# EAGLE board Optronik(2022) (EAGLE 7.5.0)
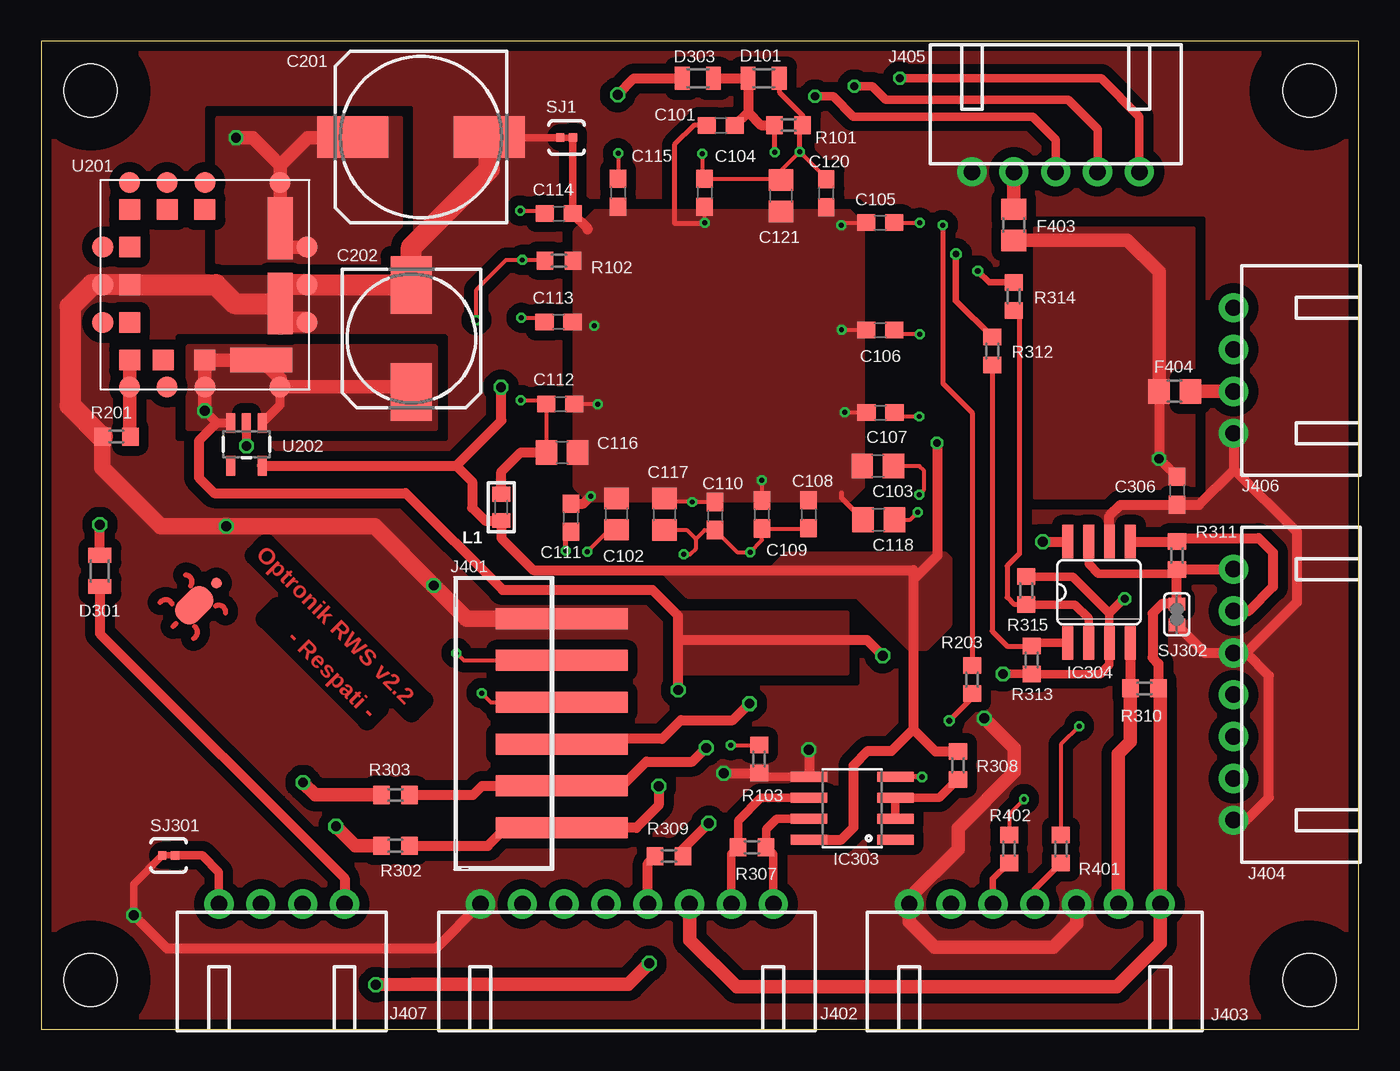
[diagram p0: board, top side]
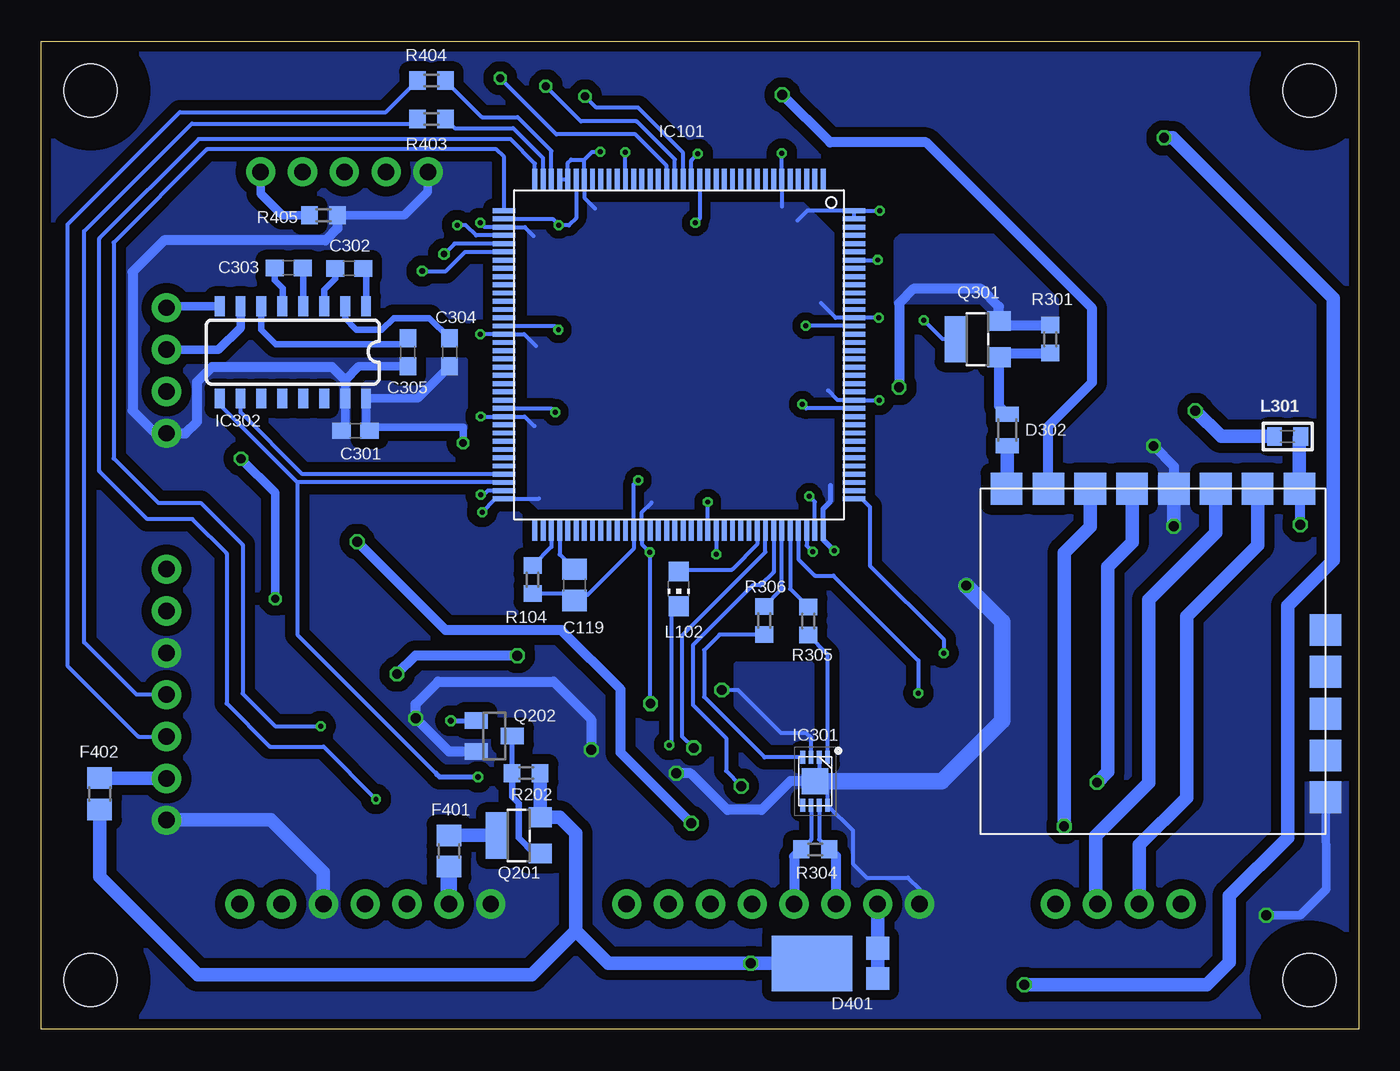
[diagram p1: board, bottom side, seen from below]

Size 80 x 60 mm. Coordinates in mm from the lower left corner, seen from the top.
Outline: 0,0 80,0 80,60 0,60 0,0
Copper layers (1*16): Top 0.035mm / dielectric 1.5mm / Bottom 0.035mm
Design rules "pcbgogo *": minimum track width 6mil, minimum drill 0.3mm, track to track 6mil, track to pad 6mil, pad to pad 6mil, via to via 6mil, smd to smd 0mil, copper to edge 0.4mm, drill to drill 0.25mm, minimum pad ring 6mil, minimum via ring 6mil, stop-mask expansion 4mil, vias tented up to drill 0.65mm, thermal gap 10mil
Net classes: 0 default: width 0.203 mm, drill 0.29 mm, clearance 0.203 mm; 1 ic: width 0.203 mm, drill 0.29 mm, clearance 0.203 mm; 2 power: width 0.406 mm, drill 0.59 mm, clearance 0.406 mm
Holes 3.2 mm at 3,3 77,3 77,57 3,57
tRestrict: area 0,54 to 6,60; area 74,54 to 80,60; area 74,0 to 80,6; area 0,0 to 6,6
bRestrict: area 0,0 to 6,6; area 74,0 to 80,6; area 74,54 to 80,60; area 0,54 to 6,60

## Footprints (pad centres in the part's own frame; a part is rotated, then mirrored left to right if it is on the bottom)
C0603 = smd 1.1 x 1: 1 -0.85,0; 2 0.85,0
C0805 = smd 1.3 x 1.5: 1 -0.95,0; 2 0.95,0
153CLV-1012 = smd 4.3 x 2.5: + 4.15,0; - -4.15,0
153CLV-0810 = smd 3.5 x 2.5: + 3.25,0; - -3.25,0
MICROMELF-W = smd 0.9 x 1.4: A 0.95,0; C -0.95,0
POWERDI5-3 = smd 1.39 x 1.4: 1 0.92,-2.856; 2 -0.92,-2.856 | smd 3.36 x 4.86: 3 0,1.126
L0805 = smd 1.3 x 1.5: 1 -0.95,0; 2 0.95,0
LQFP144-2 = smd 0.297 x 1.35: 1 -8.75,-10.625; 2 -8.25,-10.625; 3 -7.75,-10.625; 4 -7.25,-10.625; 5 -6.75,-10.625; 6 -6.25,-10.625; 7 -5.75,-10.625; 8 -5.25,-10.625; 9 -4.75,-10.625; 10 -4.25,-10.625; 11 -3.75,-10.625; 12 -3.25,-10.625; 13 -2.75,-10.62; 14 -2.25,-10.625; 15 -1.75,-10.625; 16 -1.25,-10.625; 17 -0.75,-10.625; 18 -0.25,-10.625; 19 0.25,-10.625; 20 0.75,-10.625; 21 1.25,-10.625; 22 1.75,-10.625; 23 2.25,-10.625; 24 2.75,-10.62; 25 3.25,-10.625; 26 3.75,-10.625; 27 4.25,-10.625; 28 4.75,-10.625; 29 5.25,-10.625; 30 5.75,-10.625; 31 6.25,-10.625; 32 6.75,-10.625; 33 7.25,-10.625; 34 7.75,-10.625; 35 8.25,-10.625; 36 8.75,-10.625; 73 8.75,10.625; 74 8.25,10.625; 75 7.75,10.625; 76 7.25,10.625; 77 6.75,10.625; 78 6.25,10.625; 79 5.75,10.625; 80 5.25,10.625; 81 4.75,10.625; 82 4.25,10.625; 83 3.75,10.625; 84 3.25,10.625; 85 2.75,10.625; 86 2.25,10.625; 87 1.75,10.625; 88 1.25,10.625; 89 0.75,10.625; 90 0.25,10.625; 91 -0.25,10.625; 92 -0.75,10.625; 93 -1.25,10.625; 94 -1.75,10.625; 95 -2.25,10.625; 96 -2.75,10.625; 97 -3.25,10.625; 98 -3.75,10.625; 99 -4.25,10.625; 100 -4.75,10.625; 101 -5.25,10.625; 102 -5.75,10.625; 103 -6.25,10.625; 104 -6.75,10.625; 105 -7.25,10.625; 106 -7.75,10.625; 107 -8.25,10.625; 108 -8.75,10.625 | smd 1.35 x 0.297: 37 10.625,-8.75; 38 10.625,-8.25; 39 10.625,-7.75; 40 10.625,-7.25; 41 10.625,-6.75; 42 10.625,-6.25; 43 10.625,-5.75; 44 10.625,-5.25; 45 10.625,-4.75; 46 10.625,-4.25; 47 10.625,-3.75; 48 10.625,-3.25; 49 10.625,-2.75; 50 10.625,-2.25; 51 10.625,-1.75; 52 10.625,-1.25; 53 10.625,-0.75; 54 10.625,-0.25; 55 10.625,0.25; 56 10.625,0.75; 57 10.625,1.25; 58 10.625,1.75; 59 10.625,2.25; 60 10.625,2.75; 61 10.625,3.25; 62 10.625,3.75; 63 10.625,4.25; 64 10.625,4.75; 65 10.625,5.25; 66 10.625,5.75; 67 10.625,6.25; 68 10.625,6.75; 69 10.625,7.25; 70 10.625,7.75; 71 10.625,8.25; 72 10.625,8.75; 109 -10.625,8.75; 110 -10.625,8.25; 111 -10.625,7.75; 112 -10.625,7.25; 113 -10.625,6.75; 114 -10.625,6.25; 115 -10.625,5.75; 116 -10.625,5.25; 117 -10.625,4.75; 118 -10.625,4.25; 119 -10.625,3.75; 120 -10.625,3.25; 121 -10.625,2.75; 122 -10.625,2.25; 123 -10.625,1.75; 124 -10.625,1.25; 125 -10.625,0.75; 126 -10.625,0.25; 127 -10.625,-0.25; 128 -10.625,-0.75; 129 -10.625,-1.25; 130 -10.625,-1.75; 131 -10.625,-2.25; 132 -10.625,-2.75; 133 -10.625,-3.25; 134 -10.625,-3.75; 135 -10.625,-4.25; 136 -10.625,-4.75; 137 -10.625,-5.25; 138 -10.625,-5.75; 139 -10.625,-6.25; 140 -10.625,-6.75; 141 -10.625,-7.25; 142 -10.625,-7.75; 143 -10.625,-8.25; 144 -10.625,-8.75
TDFN-8 = smd 0.8 x 0.29: 1 -1.45,0.75; 2 -1.45,0.25; 3 -1.45,-0.25; 4 -1.45,-0.75; 5 1.45,-0.75; 6 1.45,-0.25; 7 1.45,0.25; 8 1.45,0.75 | smd 1.6 x 1.6: 9 0,0
SO016 = smd 0.6 x 1.2: 1 -4.445,-2.8; 2 -3.175,-2.8; 3 -1.905,-2.8; 4 -0.635,-2.8; 5 0.635,-2.8; 6 1.905,-2.8; 7 3.175,-2.8; 8 4.445,-2.8; 9 4.445,2.8; 10 3.175,2.8; 11 1.905,2.8; 12 0.635,2.8; 13 -0.635,2.8; 14 -1.905,2.8; 15 -3.175,2.8; 16 -4.445,2.8
SO08 = smd 0.61 x 2.21: 1 -1.905,-2.616; 2 -0.635,-2.616; 3 0.635,-2.616; 4 1.905,-2.616; 5 1.905,2.616; 6 0.635,2.616; 7 -0.635,2.616; 8 -1.905,2.616
SO08' = smd 0.66 x 2.032: 1 -1.905,-3.073; 2 -0.635,-3.073; 3 0.635,-3.073; 4 1.905,-3.073; 5 1.905,3.073; 6 0.635,3.073; 7 -0.635,3.073; 8 -1.905,3.073
XHS-6-VERT-SMD = smd 1.27 x 8: 1 6.35,0.5; 2 3.81,0.5; 3 1.27,0.5; 4 -1.27,0.5; 5 -3.81,0.5; 6 -6.35,0.5
XHS-8-RA = drill 1 pad 1.778: 1 8.89,0; 2 6.35,0; 3 3.81,0; 4 1.27,0; 5 -1.27,0; 6 -3.81,0; 7 -6.35,0; 8 -8.89,0
XHS-7-RA = drill 1 pad 1.778: 1 7.62,0; 2 5.08,0; 3 2.54,0; 4 0,0; 5 -2.54,0; 6 -5.08,0; 7 -7.62,0
XHS-5-RA = drill 1 pad 1.778: 1 5.08,0; 2 2.54,0; 3 0,0; 4 -2.54,0; 5 -5.08,0
XHS-4-RA = drill 1 pad 1.778: 1 3.81,0; 2 1.27,0; 3 -1.27,0; 4 -3.81,0
L0603 = smd 0.9 x 1.1: 1 -0.794,0; 2 0.794,0
CHIP-LED0805 = smd 1.2 x 1.2: A 0,-1.05; C 0,1.05
SOT23-W = smd 1.2 x 1.4: 1 -1.1,-1.3; 2 1.1,-1.3 | smd 2.8 x 1.4: 3 0,1.3
SOT23 = smd 1 x 1.4: 1 -0.95,-1.1; 2 0.95,-1.1; 3 0,1.1
R0603 = smd 1 x 1.1: 1 -0.85,0; 2 0.85,0
SJ_2S-TRACE_THICK = smd 0.5 x 0.5: 1 -0.381,0; 2 0.381,0
SJS = smd 0.762 x 1.016: 1 -0.635,0; 2 0.635,0
OKL2T/3W5NC = smd 1.27 x 1.27: 1 -6.2,0; 1@1 -4.57,0; 2 -2.29,6.2; 2@1 -6.2,4.57; 3 0,6.2; 3@1 2.29,6.2; 4 6.2,4.57; 5 6.2,0; 5@1 4.57,0; 6 6.2,-4.57; 6@1 4.57,-4.57; 7 0,-6.2; 7@1 0,-4.57; 8 -2.29,-6.2; 8@1 -2.29,-4.57; 9 -6.2,-4.57; 9@1 -4.57,-4.57; 10 -6.2,-2.29; 10@1 -4.57,-2.29; 11 6.2,-2.29; 11@1 4.57,-2.54; 12 2.29,-6.2; 12@1 2.29,-4.57 | smd 3.75 x 1.5: 2@2 -3.43,4.57; 3@2 1.14,4.57 | smd 1.5 x 3.75: 4@1 4.57,3.43
SOT23-5 = smd 0.55 x 1.2: 1 -0.95,-1.3; 2 0,-1.3; 3 0.95,-1.3; 4 0.95,1.3; 5 -0.95,1.3
MOD_CP2105_BOARD = smd 1.93 x 1.93: 1 -10.477,8.89; 2 -10.477,6.35; 3 -10.477,3.81; 4 -10.477,1.27; 5 -10.477,-1.27; 6 -10.477,-3.81; 7 -10.477,-6.35; 8 -10.477,-8.89; 9 8.255,10.477; 10 5.715,10.477; 11 3.175,10.477; 12 0.635,10.477; 13 -1.905,10.477
KURRO-LOGO = smd 2.54 x 1.651 rotated 45 bottom: P$1 0,0 | smd 0.635 x 0.635 rotated 45 bottom: P$2 1.347,1.347

## Placement (x,y rotation side)
C101  100n  [C0603]  41.27,54.89 180 top
C102  2u2  [C0805]  34.92,31.29 90 top
C103  2u2  [C0805]  50.8,34.21 180 top
C104  100n  [C0603]  40.28,50.8 270 top
C105  100n  [C0603]  50.95,48.98 180 top
C106  100n  [C0603]  50.95,42.47 180 top
C107  100n  [C0603]  50.96,37.46 180 top
C108  100n  [C0603]  46.6,31.27 90 top
C109  100n  [C0603]  43.76,31.26 90 top
C110  100n  [C0603]  40.92,31.17 90 top
C111  100n  [C0603]  32.17,31.07 90 top
C112  100n  [C0603]  31.53,37.96 0 top
C113  100n  [C0603]  31.41,42.95 0 top
C114  100n  [C0603]  31.43,49.53 0 top
C115  100n  [C0603]  35.02,50.8 270 top
C116  4u7  [C0805]  31.62,35.03 0 top
C117  1u  [C0805]  37.85,31.27 90 top
C118  1u  [C0805]  50.85,30.95 180 top
C119  2u2  [C0805]  47.62,26.99 270 bottom
C120  100n  [C0603]  47.67,50.77 270 top
C121  1u  [C0805]  44.91,50.61 270 top
C201  470u/35V  [153CLV-1012]  23.06,54.18 180 top
C202  1000u/6V3  [153CLV-0810]  22.47,41.95 270 top
C301  100n  [C0603]  60.91,36.35 180 bottom
C302  100n  [C0603]  61.3,46.21 0 bottom
C303  100n  [C0603]  64.98,46.23 0 bottom
C304  100n  [C0603]  55.2,41.11 270 bottom
C305  100n  [C0603]  57.74,41.11 90 bottom
C306  100n  [C0603]  68.97,32.7 270 top
D101  SCHOTTKY  [MICROMELF-W]  43.87,57.75 180 top
D301  SCHOTTKY  [MICROMELF-W]  3.56,27.84 270 top
D302  SCHOTTKY  [MICROMELF-W]  21.34,36.39 90 bottom
D303  SCHOTTKY  [MICROMELF-W]  39.87,57.74 0 top
D401  SDT5100LP5  [POWERDI5-3]  32.08,4.01 90 bottom
F401  2A  [L0805]  55.24,10.84 90 bottom
F402  2A  [L0805]  76.45,14.31 90 bottom
F403  2A  [L0805]  59.05,48.85 270 top
F404  1A  [L0805]  68.82,38.73 180 top
IC101  STM32F723ZET  [LQFP144-2]  41.27,40.96 180 bottom
IC301  MCP2544FDT-E  [TDFN-8]  33.01,15.07 270 bottom
IC302  SP3232EUCN-L  [SO016]  64.72,41.11 180 bottom
IC303  SP3485  [SO08]  49.24,13.42 90 top
IC304  MAX4313ESA  [SO08']  64.23,26.54 0 top
J401  PROG_DEBUG  [XHS-6-VERT-SMD]  31.1,18.59 270 top
J402  BUS_PANEL  [XHS-8-RA]  35.56,7.62 180 top
J403  THERMAL  [XHS-7-RA]  60.33,7.62 180 top
J404  SONY  [XHS-7-RA]  72.39,20.32 270 top
J405  LRF_NOPTEL  [XHS-5-RA]  61.59,52.07 0 top
J406  IMU  [XHS-4-RA]  72.39,40.01 270 top
J407  PROG_EXTERNAL  [XHS-4-RA]  14.61,7.62 180 top
L1  FB_0603  [L0603]  27.94,31.7 90 top
L102  GREEN  [CHIP-LED0805]  41.3,26.75 180 bottom
L301  FB_0603  [L0603]  4.33,36 180 bottom
Q201  BSS215PH6327XT  [SOT23-W]  51.01,11.78 90 bottom
Q202  2N2222  [SOT23]  52.49,17.81 270 bottom
Q301  BSS215PH6327XT  [SOT23-W]  23.15,41.91 90 bottom
R101  100K  [R0603]  45.39,54.9 180 top
R102  100K  [R0603]  31.43,46.67 0 top
R103  330R  [R0603]  43.59,16.42 90 top
R104  3k  [R0603]  50.16,27.3 90 bottom
R201  1k37  [R0603]  4.56,35.99 0 top
R202  10k  [R0603]  50.55,15.56 180 bottom
R203  120R  [R0603]  56.52,21.24 90 top
R301  100k  [R0603]  18.73,41.91 90 bottom
R302  120R  [R0603]  21.5,11.15 180 top
R303  120R  [R0603]  21.51,14.23 180 top
R304  120R  [R0603]  33,10.93 0 bottom
R305  120R  [R0603]  33.43,24.8 90 bottom
R306  120R  [R0603]  36.1,24.82 90 bottom
R307  120R  [R0603]  43.16,11.06 180 top
R308  10k  [R0603]  55.66,16.04 90 top
R309  75R  [R0603]  38.12,10.52 180 top
R310  75R  [R0603]  66.99,20.71 180 top
R311  75R  [R0603]  68.96,28.77 90 top
R312  120R  [R0603]  57.74,41.19 90 top
R313  10k  [R0603]  60.14,22.43 90 top
R314  120R  [R0603]  59.05,44.51 90 top
R315  10k  [R0603]  59.8,26.64 90 top
R401  1k  [R0603]  61.91,10.95 270 top
R402  1k  [R0603]  58.77,10.96 270 top
R403  1k  [R0603]  56.3,55.28 0 bottom
R404  1k  [R0603]  56.31,57.61 0 bottom
R405  10k  [R0603]  62.86,49.43 180 bottom
SJ1  CLOSED  [SJ_2S-TRACE_THICK]  31.9,54.15 0 top
SJ301  NC  [SJ_2S-TRACE_THICK]  7.74,10.56 180 top
SJ302  NO  [SJS]  68.95,25.2 90 top
U201  OKL-T/3-W12P-C  [OKL2T/3W5NC]  9.94,45.21 270 top
U202  V_REG_LDOSMD  [SOT23-5]  12.46,35.52 180 top
U301  MOD_CP2105_BRD  [MOD_CP2105_BOARD]  12.5,22.35 270 bottom
U$2  KURRO_FOOTPRINT  [KURRO-LOGO]  9.29,25.75 90 bottom

## Library data of the parts
C101 C104-C115 C120 C201 C202 C301-C306 R101-R104 R202 R203 R301-R303 R307 R308 R401-R405 = resistor
C102 C103 C116-C119 C121 F401-F404 R201 R304-R306 R309-R315 = rcl
D101 D301-D303 = diode
D401 IC301 Q301 U301 = rcws
IC101 = micro-stm_v3.1
IC302 = SparkFun-DigitalIC; PROD_ID: IC-08171
IC303 = SparkFun-DigitalIC
IC304 = maxim
J401-J407 = SparkFun-Connectors
L1 L301 = rc-master
L102 = led
Q201 Q202 = scorpion
SJ1 SJ301 U$2 = SparkFun
SJ302 = jumper
U201 = encPhone
U202 = pixhawk2

## Nets
0V: IC304.7 J402.6 J403.7 J404.7 R310.1 R311.1 SJ302.2
!LRF_EN [ic]: IC101.20 J405.1 R405.2
!RST [ic]: C101.1 D101.A D303.A IC101.25 R101.2
+3V3: C301.1 C304.2 IC302.16 IC303.8 L1.1 Q301.2 R301.2 R308.2 U202.5
+5V: C202.+ C306.1 F403.2 F404.2 IC301.3 IC304.3 L301.2 R313.1 R315.2 U201.4 U201.4@1 U201.5 U201.5@1 U202.1 U202.3
+12V: C201.+ D401.3 F402.1 Q201.2 R202.1 U201.2 U201.2@1 U201.2@2
AGND [ic]: C101.2 C102.2 C103.2 C104.2 C105.2 C106.2 C107.2 C108.2 C109.2 C110.2 C111.2 C112.2 C113.2 C114.2 C115.2 C116.2 C117.2 C118.2 C119.2 C120.2 C121.2 IC101.16 IC101.31 IC101.38 IC101.51 IC101.61 IC101.85 IC101.94 IC101.107 IC101.120 IC101.130 R102.2 R104.1 SJ1.2
BOOT0 [ic]: IC101.138 Q301.3 R102.1
BUS_CANH: IC301.7 J402.3 R304.2
BUS_CANL: IC301.6 J402.4 R304.1
BUS_RXD: IC101.103 R306.2
BUS_TXD: IC101.104 R305.2
CAMERA_DISABLE: IC101.42 R314.2
CAMERA_SELECT [ic]: IC101.41 R312.2
GND: C201.- C202.- C301.2 C305.1 C306.2 IC301.2 IC301.8 IC301.9 IC302.15 IC303.5 IC304.6 J401.6 J402.1 J403.1 J403.5 J404.1 J404.5 J405.5 J406.1 Q202.2 R103.1 R201.1 R405.1 SJ1.1 SJ301.2 SJ302.1 U201.3 U201.3@1 U201.3@2 U201.7 U201.7@1 U202.2 U301.4 U301.9
IMU_485_A: IC303.6 J402.7 R307.2
IMU_485_B: IC303.7 J402.8 R307.1
IMU_RX: IC302.7 J406.3
IMU_RXD [ic]: IC101.69 IC302.10
IMU_TX: IC302.8 J406.4
IMU_TXD [ic]: IC101.70 IC302.9 IC303.4
LRF_RXD [ic]: IC101.19 J405.2
LRF_TXD [ic]: IC101.18 J405.3
N$1: IC101.75 R104.2
N$2: IC101.100 L102.A
N$3: F403.1 J405.4
N$4 [ic]: F402.2 J404.2
N$5: J403.4 R401.2
N$6: R201.2 U201.6 U201.6@1
N$7: F401.1 J403.2
N$8: J403.3 R402.2
N$9: L102.C R103.2
N$10: IC303.2 IC303.3 R308.1
N$12: IC304.1 R312.1 R313.2
N$13: C119.1 IC101.76
N$14: IC301.1 R305.1
N$15: IC301.4 R306.1
N$16: R303.2 U301.5
N$17: Q202.1 R203.1
N$18: R302.2 U301.6
N$19: D303.C U301.7
N$20: IC304.8 R309.1
N$21: D302.C U301.8
N$22: IC304.2 R314.1 R315.1
N$23: D301.C L301.1 U301.1
N$24: D302.A Q301.1 R301.1
N$27 [ic]: J404.4 R403.1
N$29 [ic]: J404.3 R404.1
N$30: C103.1 IC101.71
N$31: C305.2 IC302.6
N$32: C302.2 IC302.1
N$33: C303.2 IC302.4
N$39: Q201.1 Q202.3 R202.2
N$46: C102.1 IC101.106
N$55: F404.1 J406.2
N$68: C302.1 IC302.3
N$69: C303.1 IC302.5
N$72: C304.1 IC302.2
PROG_USB_D+: J407.2 U301.2
PROG_USB_D-: J407.3 U301.3
PROG_USB_GND: J407.1 SJ301.1
PROG_USB_V+: D301.A J407.4
RAW_12V: D401.1 D401.2 J402.2
SONY_RXD [ic]: IC101.34 R404.2
SONY_TXD [ic]: IC101.35 R403.2
SWCLK [ic]: IC101.109 J401.5
SWDIO [ic]: IC101.105 J401.4
THERMAL_PWR_EN [ic]: IC101.40 R203.2
THERMAL_RXD [ic]: IC101.36 R402.1
THERMAL_TXD [ic]: IC101.37 R401.1
THERMAL_VDD: F401.2 Q201.3
VCP_RX [ic]: IC101.102 J401.1 R302.1
VCP_TX [ic]: IC101.101 J401.2 R303.1
VDD [ic]: C104.1 C105.1 C106.1 C107.1 C108.1 C109.1 C110.1 C111.1 C112.1 C113.1 C114.1 C115.1 C116.1 C117.1 C118.1 C120.1 C121.1 D101.C IC101.6 IC101.17 IC101.30 IC101.32 IC101.33 IC101.39 IC101.52 IC101.62 IC101.72 IC101.86 IC101.95 IC101.108 IC101.121 IC101.131 IC101.143 IC101.144 J401.3 L1.2 R101.1
VIDEO_OUT: J402.5 R309.2
VIDEO_SONY_OUT [ic]: IC304.5 J404.6 R311.2
VIDEO_THERMAL_OUT: IC304.4 J403.6 R310.2

## Tracks (layer width: path | path; a pad name or v marks a point on that pad's centre or on a via)
0V
  Top 0.508: R311.1 68.72,27.68 64.17,27.68 63.59,28.26 IC304.7
  Top 0.61: J404.7 72.37,27.92 R311.1 SJ302.2 68.05,25.83 67.48,25.26 67.48,22.57 67.84,22.21 R310.1
  Top 0.813: R310.1 67.94,20.6 J403.7 67.94,5.22 65.3,2.58 42.22,2.58 39.37,5.43 J402.6
!LRF_EN  (via drill 0.5)
  Top 0.508: J405.1 66.67,55.42 64.35,57.75 v52.13,57.75
  Bottom 0.254: IC101.20 42.02,52.43 43.93,54.34 48.72,54.34 v52.13,57.75
  Bottom 0.508: R405.2 65.37,49.43 66.68,50.74 J405.1
!RST  (via drill 0.3)
  Top 0.305: v44.53,53.26 R101.2
  Top 0.61: D303.A 40.83,57.75 D101.A 42.92,55.69 | C101.1 42.92,55.69 | 42.92,55.69 43.7,54.91 R101.2
  Bottom 0.254: IC101.25 v44.52,53.26 v44.53,53.26
+3V3  (via drill 0.45, 0.6)
  Top 0.61: U202.5 25.2,34.22 | 25.2,34.22 27.94,36.96 27.94,38.96 v27.92,38.98 | 25.2,34.22 26.17,33.26 26.17,31.67 26.95,30.89 27.93,30.89 L1.1 27.94,29.83 29.89,27.88 52.95,27.88 52.95,27.31 | 52.95,27.31 54.42,28.79 54.42,35.56 v54.38,35.6 | 52.95,27.31 52.95,18.22 | 52.95,18.22 54.3,16.88 55.65,16.88 R308.2 | IC303.8 48.59,11.52 49.33,12.26 49.33,16.04 50.2,16.91 51.64,16.91 52.95,18.22
  Bottom 0.457: v54.38,35.6 54.38,36.56 60.28,36.56
  Bottom 0.508: C304.2 57.15,38.31 IC302.16 60.28,36.56 C301.1
  Bottom 0.61: R301.2 21.6,42.76 Q301.2 21.85,43.88 22.93,44.97 27.04,44.97 27.92,44.09 v27.92,38.98
  pour Bottom (isolate 0.61, rank 2, no thermals): 18.33,43.1 18.33,44.28 22.21,48.16 27.81,48.16 28.1,47.87 28.1,44.18 22.95,44.18 22.06,43.29 21.87,43.1 18.34,43.1
  pour Top (isolate 0.61, rank 2, no thermals): 37.83,27.73 39.26,26.3 49.55,26.3 52.69,23.15 53.74,23.15 55.19,24.6 55.19,28.55 54.89,28.85 45.25,28.85 44.3,27.9 38.01,27.9 37.84,27.73
  pour Bottom (isolate 0.61, rank 2, no thermals): 54.24,40.05 54.24,36.52 60.42,36.52 60.42,40.65 54.25,40.65 54.25,40.08
+5V  (via drill 0.5, 0.55, 0.6)
  Top 0.508: 64.86,25.27 IC304.3 64.86,22.15 64.29,21.58 R313.1 v58.4,21.58 | R315.2 62.64,27.5 64.86,25.27 | 64.86,25.27 65.73,26.14 v65.78,26.14
  Top 0.533: v9.92,37.57 10.67,36.83 U202.3 | U202.1 14.51,37.92 U201.4
  Top 0.61: F404.2 v67.87,34.66 C306.1 | v38.68,20.6 38.68,23.65 | 38.68,23.65 38.68,25.11 37.1,26.68 28.01,26.68 22.13,32.56 10.51,32.56 9.57,33.5 9.57,35.73 10.67,36.83 | 38.68,23.65 50.13,23.65 v51.08,22.7
  Top 0.813: F404.2 67.87,46 65.95,47.92 59.08,47.92 F403.2 | v9.92,37.57 9.92,39 U201.5 U201.5@1 U201.4@1 14.51,39.5 U201.4 22.16,39.01 C202.+
  Bottom 0.254: IC301.3 33.26,17.71 33.54,18 35.08,18 37.69,20.6 v38.68,20.6
  Bottom 0.508: v65.78,26.14 65.78,32.57 v67.87,34.66
  Bottom 0.61: v51.08,22.7 57.28,22.7 v58.4,21.58
  Bottom 0.813: L301.2 8.35,36 v9.92,37.57
  pour Top (isolate 0.61, rank 2, no thermals): 8.9,41.45 8.9,36.48 23.95,36.48 23.95,41.45
  pour Top (isolate 0.61, rank 2, no thermals): 60.34,48.59 60.34,32.34 69.96,32.34 69.96,48.59 60.35,48.59
  pour Top (isolate 0.61, rank 2, no thermals): 38.59,25.09 38.59,21.64 48.93,21.64 48.93,25.28 38.59,25.28 38.59,25.08
  pour Bottom (isolate 0.61, rank 2, no thermals): 33.22,22.2 33.22,17.33 34.67,17.33 35.49,17.33 37.79,19.62 37.79,22.2 33.23,22.2
+12V  (via drill 0.6)
  Top 0.813: U201.2 14.64,47.5 14.48,47.67 14.48,48.61 U201.2@2 U201.2@1 14.51,52.47 | 14.51,52.47 16.17,54.13 19.42,54.13 19.38,54.18 C201.+ | 14.51,52.47 12.85,54.13 v11.83,54.13 | v36.91,4.01 35.64,2.74 22.57,2.74 v20.32,2.72
  Bottom 0.813: F402.1 76.45,9.27 70.5,3.32 50.21,3.32 47.55,5.98 | 47.55,5.98 47.55,11.91 48.52,12.88 Q201.2 R202.1 | v11.83,54.13 11.31,54.13 1.55,44.38 1.55,28.49 4.32,25.73 4.32,11.65 7.86,8.11 7.86,4.08 9.22,2.72 v20.32,2.72 | D401.3 v36.91,4.01 45.58,4.01 47.55,5.98
  pour Top (isolate 0.61, rank 2, no thermals): 10.74,55.33 21.82,55.33 21.82,46.55 10.72,46.55 10.72,55.33
AGND  (via drill 0.3)
  Top 0.254: v40.28,48.96 C104.2 | v48.57,48.83 48.73,48.98 C105.2 | v48.59,42.47 C106.2 | v48.8,37.46 C107.2 | v43.75,33.35 43.75,32.12 C109.2 | C117.2 38.05,32.02 v39.52,32.02 C110.2 | v33.8,37.95 C112.2
  Top 0.305: v40.28,48.96 38.45,48.96 38.45,53.7 39.64,54.89 C101.2 | C118.2 48.6,32.24 48.6,32.56
  Top 0.457: SJ1.2 C114.2
  Top 0.61: C111.2 32.91,31.92 v33.36,32.36 | C114.2 33.17,48.64 33.17,48.57
  Bottom 0.254: C119.2 47.95,26.37 | R104.1 48.04,26.45 47.95,26.37 | IC101.130 33.55,42.71 v33.57,42.73 | IC101.16 40.02,49.22 v40.28,48.96 | IC101.38 48.95,49.21 v48.57,48.83 48.56,48.82 47.97,48.82 47.52,49.26 IC101.31 | IC101.51 48.83,42.71 v48.59,42.47 | IC101.61 49.04,37.71 v48.8,37.46 | v43.75,33.35 44.02,33.08 IC101.85 44.02,29.18 46.84,26.37 47.95,26.37 | IC101.94 v39.52,32.02 | IC101.107 33.02,32.03 v33.36,32.36 | IC101.120 33.55,37.71 v33.8,37.95
  pour Top (isolate 0.508, no thermals): 32.41,32.98 33.22,32.17 49.07,32.17 49.89,32.98 49.89,48.83 49.07,49.64 33.63,49.64 32.41,48.43
BOOT0  (via drill 0.3)
  Top 0.254: R102.1 30.54,46.72 v29.22,46.72 28.24,46.72 26.42,44.9 v26.42,43.07
  Bottom 0.254: IC101.138 29.23,46.71 v29.22,46.72 | Q301.3 25.27,41.91 v26.42,43.07
BUS_CANH
  Bottom 0.254: IC301.7 32.76,11.54 R304.2
  Bottom 0.61: R304.2 31.75,10.53 J402.3
BUS_CANL
  Bottom 0.254: IC301.6 33.26,11.52 R304.1
  Bottom 0.61: R304.1 34.29,10.49 J402.4
BUS_RXD
  Bottom 0.254: R306.2 35.02,26.74 IC101.103
BUS_TXD
  Bottom 0.254: IC101.104 34.52,26.75 R305.2
CAMERA_DISABLE  (via drill 0.35)
  Top 0.406: v56.87,46.04 57.55,45.36 R314.2
  Bottom 0.254: v56.87,46.04 55.42,46.04 54.26,47.21 IC101.42
CAMERA_SELECT  (via drill 0.4)
  Top 0.406: v55.54,47.07 55.54,44.25 R312.2
  Bottom 0.254: IC101.41 54.9,47.71 v55.54,47.07
GND  (via drill 0.6)
  Top 0.457: SJ1.1 27.24,54.15 C201.- | SJ301.2 5.62,8.82 v5.62,6.93
  Top 0.508: R103.1 43.83,15.33 IC303.5
  Top 0.533: U202.2 v12.46,35.42
  Top 0.61: SJ302.1 70.66,22.86 J404.5 73.16,22.86 | 73.16,22.86 76.23,25.93 76.23,30.2 72.44,33.99 72.42,33.99 | IC304.6 64.86,31.18 65.54,31.85 C306.2 70.28,31.85 72.42,33.99 | J404.1 73.16,12.7 74.54,14.08 74.54,21.49 73.16,22.86 | 72.42,33.99 72.42,36.16 J406.1 | J402.1 23.95,4.9 7.64,4.9 v5.62,6.93 | v46.6,16.98 46.63,16.96 IC303.5 | v41.45,15.55 43.57,15.55 R103.1
  Top 0.813: J403.5 62.87,6.41 61.44,4.98 54.25,4.98 52.7,6.53 J403.1 52.7,7.98 55.67,10.95 55.67,12.22 59.09,15.64 59.09,17.07 v57.27,18.89
  Top 1.016: R201.1 3.71,34.09 7.25,30.55 v11.23,30.55 v11.24,30.55 20.24,30.55 v23.84,26.95 25.85,24.94 J401.6
  Top 1.27: U201.3@2 11.75,44.06 10.6,45.21 U201.7@1 U201.7 3.09,45.21 1.75,43.88 1.75,37.88 3.64,35.99 R201.1 | U201.3@2 | U201.3@2 14.5,45.23 14.52,45.25 14.56,45.21 U201.3 22.46,45.21 C202.- 22.47,47.5 27.21,52.23 C201.- | U201.3@1 14.72,42.92 14.5,43.14 U201.3@2
  Bottom 0.254: J402.1 26.67,8.52 27.37,9.22 29.88,9.22 30.72,10.06 30.72,12.08 IC301.8 32.26,14.58 32.74,15.07 IC301.9 32.76,15.32 IC301.2
  Bottom 0.508: C305.1 60.72,40.26 61.55,39.43 IC302.15 61.55,36.56 C301.2 | J405.5 56.52,50.86 57.94,49.43 R405.1 | v5.62,6.93 3.56,6.93 1.96,8.52 U301.9
  Bottom 0.61: R405.1 62.01,48.63 62.73,47.91 72.53,47.91 74.45,45.99 74.45,37.58 73.07,36.2 J406.1 71.25,36.2 70.54,36.91 70.54,39.31 69.62,40.23 62.34,40.23 61.55,39.43 | Q202.2 55.24,16.86 v57.27,18.89 57.27,19.75 55.9,21.11 48.89,21.11 46.6,18.83 v46.6,16.98 | IC301.9 34.51,15.07 36.26,13.32 38.34,13.32 40.57,15.55 v41.45,15.55 | v12.46,35.42 11.23,34.19 U301.4
  Bottom 0.813: J403.5 62.87,9.55 66.05,12.74 72.35,12.74 J404.1 | U301.4 11.23,30.56 v11.24,30.55
  Bottom 1.016: v23.84,26.95 21.65,24.76 21.65,18.73 25.32,15.07 IC301.9
  pour Top (isolate 0.61, rank 3, no thermals): 0.02,59.98 0.02,-0.01 80,-0.01 80,59.98 0.03,59.98
  pour Bottom (isolate 0.61, rank 3, no thermals): 0.01,59.99 0.01,-0.08 80.01,-0.08 80.01,59.99 0.01,59.99
IMU_485_A
  Top 0.508: J402.7 41.91,10.66 R307.2 42.31,12.68 43.69,14.06 IC303.6
IMU_485_B
  Top 0.508: J402.8 44.45,10.63 R307.1 44.01,12.14 44.66,12.79 IC303.7
IMU_RX
  Bottom 0.508: IC302.7 67.9,42.61 69.23,41.27 J406.3
IMU_RXD
  Bottom 0.254: IC101.69 64.14,33.71 67.9,37.47 IC302.10
IMU_TX
  Bottom 0.508: IC302.8 72.3,43.91 J406.4
IMU_TXD  (via drill 0.35)
  Top 0.305: v53.48,15.33 v53.47,15.33 IC303.4
  Bottom 0.254: IC302.9 69.17,37.92 64.45,33.2 | 64.45,33.2 IC101.70 | 64.45,33.2 64.45,23.97 56.04,15.56
  Bottom 0.305: 56.04,15.56 55.81,15.33 v53.48,15.33
LRF_RXD  (via drill 0.5)
  Top 0.508: J405.2 64.14,54.66 62.34,56.45 51.28,56.45 50.46,57.27 v49.37,57.27
  Bottom 0.254: IC101.19 41.52,52.82 43.84,55.14 47.24,55.14 v49.37,57.27
LRF_TXD  (via drill 0.5)
  Top 0.508: J405.3 61.59,54.03 60.21,55.41 49.32,55.41 48.08,56.66 v46.98,56.66
  Bottom 0.254: IC101.18 41.02,53.23 43.76,55.96 46.29,55.96 v46.98,56.66
N$1
  Bottom 0.254: IC101.75 49.02,29.3 R104.2
N$2
  Bottom 0.254: IC101.100 36.52,29.45 38.06,27.92 41.17,27.92 L102.A
N$3
  Top 0.813: F403.1 J405.4
N$4
  Bottom 0.813: J404.2 76.44,15.24 F402.2
N$5
  Top 0.406: J403.4 60.33,8.52 R401.2
N$6
  Top 0.813: U201.6@1 U201.6 5.37,36.03 R201.2
N$7
  Bottom 1.016: J403.2 F401.1
N$8
  Top 0.406: R402.2 57.78,9.13 J403.3
N$9  (via drill 0.3)
  Top 0.254: v41.87,17.26 R103.2
  Bottom 0.254: L102.C 41.75,25.24 41.75,17.39 v41.87,17.26
N$10
  Top 0.508: IC303.2 IC303.3 54.53,14.06 R308.1
N$12
  Top 0.305: R312.1 57.74,24.19 58.65,23.28 R313.2
  Top 0.508: R313.2 60.33,23.47 IC304.1
N$13
  Bottom 0.254: IC101.76 48.52,28.84 C119.1
N$14
  Bottom 0.254: R305.1 32.26,22.78 IC301.1
N$15
  Bottom 0.254: R306.1 38.81,23.97 39.75,23.03 39.75,20.2 36.07,16.52 IC301.4
N$16  (via drill 0.6)
  Top 0.813: v15.89,14.99 16.65,14.23 R303.2
  Bottom 0.813: U301.5 13.77,29.58 15.25,28.09 15.25,15.64 v15.89,14.99
N$17  (via drill 0.35)
  Top 0.305: R203.1 56.52,20.14 v55.13,18.74
  Bottom 0.305: v55.13,18.74 53.61,18.74 Q202.1
N$18  (via drill 0.6)
  Top 0.813: v17.9,12.32 19.07,11.15 R302.2
  Bottom 0.813: U301.6 16.31,30.53 17.9,28.94 v17.9,12.32
N$19  (via drill 0.6)
  Top 0.61: v35,56.75 35.99,57.74 D303.C
  Bottom 0.61: U301.7 18.85,36.63 16.19,39.29 16.19,43.78 26.27,53.85 32.1,53.85 v35,56.75
N$20  (via drill 0.6)
  Top 0.61: v60.81,29.62 IC304.8 | R309.1 38.97,10.94 v40.54,12.52
  Bottom 0.61: v40.54,12.52 44.82,16.8 44.82,20.65 48.42,24.24 55.44,24.24 v60.81,29.62
N$21
  Bottom 0.813: D302.C 21.34,32.88 U301.8
N$22
  Top 0.305: R315.1 59.09,25.8 58.65,26.23 58.65,28.14 59.38,28.87 59.38,43.32 R314.1
  Top 0.508: R315.1 62.75,25.8 63.59,24.95 IC304.2
N$23  (via drill 0.6)
  Top 0.61: D301.C v3.56,30.65
  Bottom 0.61: v3.56,30.65 3.56,32.81 U301.1
  Bottom 0.813: U301.1 3.61,35.93 L301.1
N$24
  Bottom 0.61: R301.1 21.6,41.06 Q301.1 21.85,37.85 D302.A
N$27
  Bottom 0.254: J404.4 74.21,20.32 77.39,23.5 77.39,48.47 70.85,55 57.43,55 R403.1
N$29
  Bottom 0.254: R404.1 59.08,55.69 71.58,55.69 78.41,48.86 78.41,22.09 74.1,17.78 J404.3
N$30  (via drill 0.3)
  Top 0.254: v53.31,32.47 53.61,32.77 53.61,33.9 53.31,34.21 C103.1
  Bottom 0.254: IC101.71 52.88,32.71 53.12,32.47 v53.31,32.47
N$31
  Bottom 0.406: C305.2 58.09,41.61 65.76,41.61 66.64,42.49 IC302.6
N$32
  Bottom 0.406: C302.2 60.28,46.03 IC302.1
N$33
  Bottom 0.406: C303.2 64.09,46.18 IC302.4
N$39
  Bottom 0.305: R202.2 Q202.3
  Bottom 0.406: Q201.1 50.06,10.68 51.02,11.63 51.02,13.74 51.4,14.12 R202.2
N$46  (via drill 0.3)
  Top 0.254: v33.16,29.01 34.49,30.34 C102.1
  Bottom 0.254: IC101.106 33.52,29.37 v33.16,29.01
N$55
  Top 0.813: F404.1 J406.2
N$68
  Bottom 0.406: C302.1 62.15,45.57 62.82,44.9 IC302.3
N$69
  Bottom 0.406: C303.1 65.83,45.49 65.35,45.01 65.35,43.92 IC302.5
N$72
  Bottom 0.406: C304.1 56.42,43.19 58.6,43.19 59.32,42.47 60.86,42.47 61.55,43.16 IC302.2
PROG_USB_D+
  Bottom 0.813: J407.2 13.34,11.21 10.46,14.08 10.46,25.08 6.15,29.4 U301.2
PROG_USB_D-
  Bottom 0.813: U301.3 8.69,30.16 12.77,26.09 12.77,14.96 15.96,11.77 15.96,7.7 J407.3
PROG_USB_GND
  Top 0.508: SJ301.1 9.77,10.56 10.79,9.54 J407.1
PROG_USB_V+
  Top 0.61: D301.A 3.56,24.04 18.43,9.17 18.43,7.63 J407.4
RAW_12V
  Bottom 0.813: J402.2 D401.1 D401.2
SONY_RXD
  Bottom 0.254: IC101.34 49.02,53.35 51.07,55.4 53.24,55.4 R404.2
SONY_TXD
  Bottom 0.254: IC101.35 49.52,52.9 51.35,54.72 54.9,54.72 R403.2
SWCLK  (via drill 0.3)
  Top 0.254: v25.21,22.85 25.66,22.4 J401.5
  Bottom 0.254: IC101.109 30.17,32.21 29.68,31.72 29.68,28.17 25.21,23.69 v25.21,22.85
SWDIO  (via drill 0.3)
  Top 0.254: v26.74,20.42 27.3,19.86 J401.4
  Bottom 0.254: IC101.105 34.02,28.55 33.03,27.55 31.91,27.55 26.74,22.39 v26.74,20.42
THERMAL_PWR_EN  (via drill 0.3)
  Top 0.305: v54.75,48.84 54.75,39.23 56.53,37.45 R203.2
  Bottom 0.254: IC101.40 53.59,48.21 54.22,48.84 v54.75,48.84
THERMAL_RXD  (via drill 0.3)
  Top 0.254: v59.67,13.98 58.77,13.08 R402.1
  Bottom 0.254: IC101.36 50.02,52.57 51.5,54.05 70.44,54.05 76.47,48.02 76.47,33.89 73.56,30.98 70.82,30.98 68.74,28.89 68.74,19.79 66.12,17.16 62.85,17.16 v59.67,13.98
THERMAL_TXD  (via drill 0.3)
  Top 0.254: v63.02,18.41 61.91,17.3 R401.1
  Bottom 0.254: IC101.37 51.9,52.97 52.36,53.43 69.94,53.43 75.6,47.76 75.6,34.68 72.89,31.96 70.32,31.96 67.78,29.42 67.78,20.39 65.8,18.41 v63.02,18.41
THERMAL_VDD
  Bottom 0.813: Q201.3 55.23,11.78 F401.2
VCP_RX  (via drill 0.6)
  Top 0.61: R302.1 27.11,11.15 28.21,12.24 J401.1 36.13,12.24 37.49,13.6 v37.49,14.77
  Bottom 0.254: IC101.102 35.52,27.76 36.33,26.95 36.79,26.95 40.43,23.32 40.43,19.7 38.41,17.69 38.41,15.69 v37.49,14.77
VCP_TX  (via drill 0.6)
  Top 0.61: R303.1 26.22,14.23 26.77,14.78 J401.2 31.62,14.76 35.25,14.76 36.74,16.25 39.54,16.25 v40.38,17.09
  Bottom 0.254: IC101.101 36.02,28.98 41.1,23.91 41.1,17.81 v40.38,17.09
VDD  (via drill 0.3, 0.6)
  Top 0.254: v29.09,49.71 30.41,49.71 C114.1 | C118.1 52.78,30.95 v53.23,31.4 | v35.03,53.19 35.03,51.62 C115.1 | v29.15,43.21 30.3,43.21 C113.1 | v40.13,53.16 40.13,51.8 C104.1 44.83,51.65 C121.1 44.91,52.12 v46.06,53.28 47.67,51.68 C120.1 | C105.1 v53.35,48.98 v53.34,48.98 | v53.34,42.21 52.06,42.21 C106.1 | C111.1 32.05,30.34 | v29.13,38.21 30.43,38.21 C112.1 C116.1 30.59,34.95 | C108.1 C109.1 43.76,29.7 v43.04,28.98 42.26,28.98 C110.1 40.28,30.32 39.73,29.77 | C117.1 39.19,30.32 39.73,29.78 39.73,29.77 | 39.73,29.77 39.73,29.16 39.41,28.84 v39.02,28.84 | C107.1 52.05,37.21 v53.32,37.21
  Top 0.305: D101.C 44.82,56.9 46.24,55.48 R101.1 46.06,54.73 v46.06,53.28
  Top 0.318: v31.86,29.07 31.86,29.91 C111.1
  Top 0.61: J401.3 31.91,17.64 37.7,17.64 38.84,18.78 42,18.78 v43.01,19.78 | L1.2 27.94,33.86 29.12,35.04 30.5,35.04 30.59,34.95
  Bottom 0.254: IC101.33 IC101.32 48.02,52.61 47.83,52.8 47.02,52.8 | IC101.144 IC101.143 | IC101.144 v29.09,49.71 | v29.09,49.71 | v53.23,31.4 52.42,32.21 IC101.72 49.82,32.21 49.79,32.24 | 47.02,52.8 IC101.30 47.02,50.5 46.38,49.85 | v46.06,53.28 46.55,53.28 47.02,52.8 | v35.03,53.19 v35.02,53.19 IC101.6 35.02,49.98 35.01,49.96 | v29.15,43.21 v29.16,43.21 IC101.131 31.77,43.21 32.67,44.11 | IC101.17 40.52,52.76 v40.13,53.16 | v53.34,48.98 53.08,48.71 IC101.39 50.64,48.71 50.09,48.16 | v53.34,42.21 IC101.52 50.68,42.21 49.96,41.48 | v53.32,37.21 IC101.62 50.64,37.21 50.06,36.63 | IC101.95 v39.02,28.84 | v29.13,38.21 IC101.121 31.64,38.21 32.23,38.8 | 42.94,31.98 43.52,31.4 IC101.86 43.52,29.47 v43.04,28.98 43.04,19.82 v43.01,19.78 | IC101.144 33.48,49.71 34.08,49.11
  Bottom 0.318: 32.07,33.02 32.07,32.07 32.52,31.61 IC101.108 32.52,29.73 v31.86,29.07
  pour Bottom (isolate 0.508, rank 2, no thermals): 32,32.17 32.41,31.76 49.8,31.76 50.29,32.26 50.29,49.64 49.89,50.05 33.77,50.05 32,48.29
VIDEO_OUT
  Top 0.61: J402.5 36.83,10.09 R309.2
VIDEO_SONY_OUT
  Top 0.61: J404.6 73.3,25.4 74.78,26.88 74.78,28.97 73.92,29.83 69.17,29.83 R311.2 66.14,29.62 IC304.5
VIDEO_THERMAL_OUT
  Top 0.61: IC304.4 R310.2
  Top 0.813: J403.6 65.41,16.72 66.14,17.45 R310.2

## Text on the board
Top: Optronik RWS v2.2 | - Respati -